# Altium PCB BugBuster_HAT.PcbDoc (part 2 of 3)
Units mm, origin at the board's own origin, x right, y up, seen from the top; angles counter-clockwise.
Board outline 110 x 80 mm, 4 copper layers (Top Layer, Mid Layer 1, Mid Layer 2, Bottom Layer), stack 1.17 mm thick; 116 components, 99 nets, 522 pads, 1540 vias.
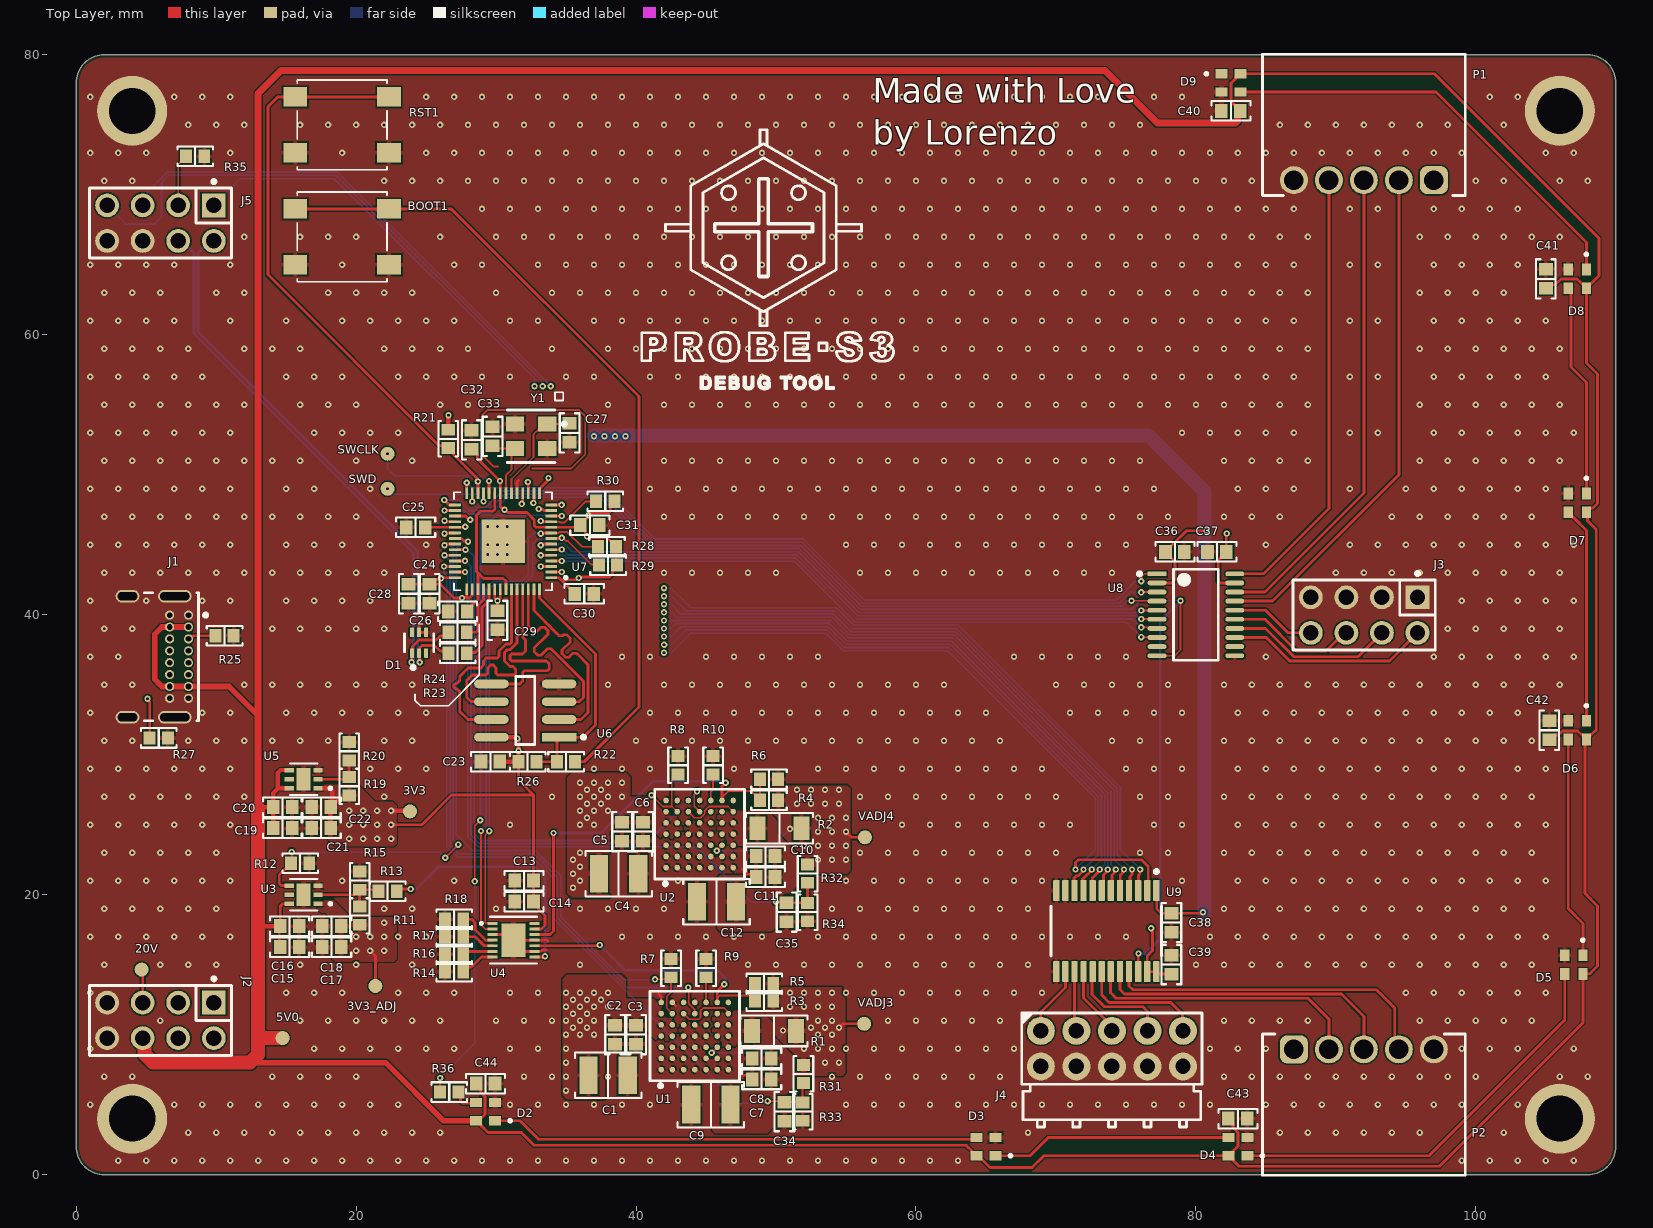
[diagram p0: Top Layer view]

## Via types
v1: diameter 0.45, hole 0.2, Top Layer to Bottom Layer, tented both sides, 1540 vias

## Nets (pads, with @x,y where several pads share a name; then routed paths per layer and width w, separated by ;. In a path a pad name is that pad's centre, name@x,y a point inside that pad or via, vN(x,y) a via of type N, cw(c..) or ccw(c..) an arc to the next point about the centre after c; other vN are vias at no path point) (continued)
3V3: 3V3.1 C13.2 C14.2 C21.2 C22.2 C23.2 C24.2 C25.2 C28.2 C29.2 C30.2 C31.2 C32.2 C36.2 C38.2 R19.2 R21.1 R26.1 R28.1 R29.1 R30.1 U4.13 U5.1 U6.8 U7.1 U7.10 U7.22 U7.33 U7.42 U7.43 U7.44 U7.48 U7.49 U8.2 U9.1 | length 164.6
  Top Layer w0.2: v1(22.5,25) 24.7,25 26.825,27.125 32.675,27.125 ; C28.2@23.75,42.175 C24.2@25.25,42.175 ; C25.2@24.925,46.25 U7.33@27.065,46.25 27.763,46.25 v1(27.8,46.287) ; U7.42@27.065,42.65 26.418,42.65 26.405,42.637 26.096,42.637 26.058,42.599 26.032,42.575 25.85,42.575 25.8,42.525 25.65,42.525 25.3,42.175 26.025,42.175 27,41.2 v1(27.566,41.2) ; v1@27.533,41.233 27.548,41.248 27.848,41.248 27.9,41.3 U7.43@27.9,41.815 ; 27.9,41.2 28.1,41.2 28.3,41.4 U7.44@28.3,41.815 ; C32.2@28.25,51.825 28.3,51.825 28.65,51.475 28.65,51.175 v1(30.275,49.55) 30.3,49.525 30.3,47.742 30.542,47.5 30.642,47.5 30.842,47.3 32.2,47.3 32.725,46.775 32.725,46.367 32.842,46.25 U7.10@33.935,46.25 36.125,46.25 36.375,46 36.375,45.793 36.5,45.668 v1(36.5,45.6) 36.548,45.552 36.717,45.552 36.742,45.527 37.898,45.527 38.2,45.225 38.25,45.225 38.575,44.9 R28.1@38.575,44.85 R29.1@38.575,43.55 ; U7.48@29.9,41.815 29.9,41.2 v1(30.1,41) ; C29.2@30.1,40.275 v1(30.1,41) ; U7.49@30.3,41.815 30.3,41.2 v1(30.1,41) ; R26.1@31.6,29.7 R26.1@31.6,29.5 31.6,28.2 32.675,27.125 ; U4.13@32.747,17.55 33.25,17.55 33.5,17.8 33.5,18.5 33.025,18.975 33.025,19.15 C14.2@32.675,19.5 C13.2@32.675,21 32.675,27.125 ; U7.1@33.935,42.65 34.475,42.65 34.625,42.5 ; C30.2@35.625,41.5 35.625,41.55 35.275,41.9 35.225,41.9 34.625,42.5 ; C31.2@36.025,46.4 36.025,46.45 36.425,46.85 36.425,46.858 36.6,47.033 v1(36.6,47.1) 36.651,47.1 36.842,47.291 38.046,47.291 38.163,47.409 38.163,47.813 R30.1@38.45,48.1 ; R29.1@38.65,43.55 38.338,43.238 38.338,42.938 38.1,42.7 36.142,42.7 36.111,42.669 35.948,42.669 v1(35.9,42.621) 35.832,42.621 35.711,42.5 34.625,42.5 ; U9.1@77.175,20.3 77.197,20.278 77.197,19.008 77.53,18.675 C38.2@78.25,18.675 80.357,18.675 80.432,18.75 v1(80.5,18.75) ; U8.2@77.225,42.275 78.275,42.275 78.5,42.5 78.5,43.825 78.225,44.1 78.175,44.1 77.825,44.45 C36.2@77.825,44.5 77.825,44.55 78.175,44.9 78.225,44.9 79.325,46 v1(80.75,46)
  Top Layer w0.3: U5.1@17.275,27.6 18.124,27.6 18.3,27.424 C22.2@18.3,26.425 ; C21.2@18.175,24.75 C22.2@18.175,26.25 ; R19.2@19.5,27.1 19.269,26.869 18.794,26.869 18.525,26.6 18.475,26.6 C22.2@18.3,26.425 ; v1(22.5,26) 23.8,26 3V3.1@23.85,25.95 ; R21.1@26.584,53.218 26.584,54.234 v1(26.6,54.25) ; U6.8@29.668,31.25 31.424,31.25 v1(31.512,31.162) 31.6,31.074 v1(31.6,30.287) R26.1@31.6,29.7 ; C23.2@30.275,29.5 R26.1@31.6,29.5 ; C22.2@18.175,26.25 18.175,26.3 C22.2@18.3,26.425 ; C22.2@18.175,26.25 18.3,26.375 C22.2@18.3,26.425
  Bottom Layer w1: v1@37,52.8 76.6,52.8 80.6,48.8 80.6,46 80.6,18.75 80.6,18.5
  other v1: 19.5,24 20.5,24 21.5,24 22.5,24 19.5,25 20.5,25 21.5,25 19.5,26 20.5,26 21.5,26 26.057,42.6 30.6,47.5 37,52.75 37.75,52.75 38.5,52.75 39.25,52.75
3V3_ADJ: 3V3_ADJ.1 C17.2 C18.2 C37.2 C39.2 R11.2 U3.1 U8.19 U9.23 U9.24 | length 12.7
  Top Layer w0.2: v1(21,16) 21.375,15.625 3V3_ADJ.1@21.375,13.475 ; v1@76.838,17.562 v1(76.8,17.6) 76.848,17.552 76.848,17.41 76.9,17.358 76.9,16 76.525,15.625 U9.23@76.525,14.5 77.125,14.5 77.3,14.325 C39.2@78.25,14.325 ; v1(82.2,45.8) 82.175,45.775 C37.2@82.175,44.5 82.175,44.45 81.825,44.1 81.775,44.1 81.6,43.925 81.6,42.4 81.725,42.275 U8.19@82.775,42.275
  other v1: 20,16 22,16 20,17 21,17 22,17 22,18
5V_BUCK: 5V0.1 C15.2 C16.2 C19.2 C20.2 C40.2 C41.2 C42.2 C43.2 C44.2 D2.4 D3.4 D4.4 D5.4 D6.4 D7.4 D8.4 D9.4 J1.A4 J1.A9 J1.B4 J1.B9 J2.6 U3.6 U5.4 U5.6 | length 389
  Top Layer w0.2: C15.2@14.575,16.25 14.5,16.325 14.5,17.675 C16.2@14.575,17.75 14.575,19.175 14.75,19.35 U3.6@15.225,19.35 ; D2.4@28.575,3.85 28.8,4.075 28.975,4.075 29.2,4.3 29.2,4.74 29.202,4.741 29.202,5.559 28.905,5.855 28.905,6.17 C44.2@28.575,6.5 ; D2.4@28.675,3.85 28.9,3.625 28.9,3.525 29.425,3 31.8,3 32.7,2.1 63.575,2.1 64,1.675 64,1.575 64.225,1.35 D3.4@64.325,1.35 64.55,1.125 64.675,1.125 65.3,0.5 68.3,0.5 69.15,1.35 D4.4@82.325,1.35 D4.4@82.425,1.35 ; C43.2@82.325,4 82.65,3.675 82.65,3.35 82.823,3.177 82.834,3.177 82.952,3.059 82.952,3.048 83,3 83,2.025 82.65,1.675 82.65,1.575 D4.4@82.425,1.35 ; C40.2@83.175,76 83.175,76.05 82.825,76.4 82.775,76.4 82.5,76.675 82.5,77.975 82.85,78.325 82.85,78.425 83.075,78.65 D9.4@83.175,78.65 97.05,78.65 108.8,66.9 108.8,64.225 108.225,63.65 108.125,63.65 D8.4@107.9,63.425 ; C41.2@105,63.325 105.258,63.583 105.683,63.583 106.087,63.987 107.238,63.987 107.575,63.65 107.675,63.65 D8.4@107.9,63.425 ; C42.2@105.25,31.075 105.58,31.405 105.895,31.405 106.191,31.702 107.009,31.702 107.01,31.7 107.275,31.7 107.575,31.4 107.675,31.4 D6.4@107.9,31.175 ; D4.4@82.425,1.35 82.65,1.125 82.65,1.025 83.075,0.6 97.4,0.6 107.65,10.85 D5.4@107.65,14.325 107.683,14.358 108.158,14.358 108.7,14.9 108.7,19.2 107.8,20.1 107.8,30.975 D6.4@107.9,31.075 D6.4@107.9,31.175 ; D6.4@107.9,31.175 108.125,31.4 108.225,31.4 108.6,31.775 108.6,46.1 107.983,46.717 107.983,47.487 108.125,47.629 108.37,47.629 108.7,47.959 108.7,57.2 107.9,58 D8.4@107.9,63.325 D8.4@107.9,63.425
  Top Layer w0.3: 13,17.7 13.05,17.75 C16.2@14.575,17.75 ; 13,26.2 13.05,26.25 C20.2@14.075,26.25 ; C19.2@14.075,24.75 C20.2@14.075,26.25 ; U5.6@15.225,27.6 14.4,27.6 ; U5.4@15.225,28.9 14.6,28.9 14.4,28.7 14.4,27.6 ; C20.2@14.075,26.25 14.075,27.275 14.4,27.6
  Top Layer w0.4: J1.A4@8.025,39.125 J1.B9@6.675,39.125 6.125,39.125 5.6,38.6 5.6,35.4 6.001,34.999 6.125,34.875 J1.B4@6.675,34.875 J1.A9@8.025,34.875 10.925,34.875 13,32.8 ; 12.414,8 22.1,8 26.25,3.85 D2.4@28.575,3.85 D2.4@28.675,3.85
  Top Layer w0.5: 13,26.2 13,32.8 13,77.25 14.625,78.875 73.5,78.875 77.25,75.125 82.825,75.125 82.975,75.275 82.975,75.8 C40.2@83.175,76
  Top Layer w1: J2.6@4.75,9.75 4.884,9.616 4.884,8.616 5.5,8 12.414,8 13,8.586 13,9.775 ; 13,26.2 13,17.7 13,9.775 ; 5V0.1@14.75,9.75 13.025,9.75 13,9.775
20V_USB: 20V.1 C1.2 C2.2 C3.2 C4.2 C5.2 C6.2 J2.5 U1.A4 U1.A5 U1.A6 U1.B4 U1.B5 U2.A4 U2.A5 U2.A6 U2.B4 U2.B5 | length 2.4
  Top Layer w0.2: 20V.1@4.675,14.65 4.75,14.575 J2.5@4.75,12.29
  other v1: 35,6 35,7 35,8 35,9 35,10 36,10 37,10 35.5,10.5 36.5,10.5 35,11 36,11 37,11 35.5,11.5 36.5,11.5 35,12 36,12 37,12 38,12 35.5,12.5 36.5,12.5 37.5,12.5 35,13 36,13 37,13 38,13 35.5,20.5 36,21 35.5,21.5 36,22 35.5,22.5 36,23 36,25 37,25 36.5,25.5 36,26 37,26 38,26 36.5,26.5 37.5,26.5 36,27 37,27 38,27 39,27 36.5,27.5 37.5,27.5 36,28 37,28 38,28 39,28
+15V_ANA: J2.1
-15V_ANA: J2.3